# Altium PCB PCB2.PcbDoc (part 1 of 2)
Units mm, origin at the board's own origin, x right, y up, seen from the top; angles counter-clockwise.
Board outline 90.3 x 60.42 mm, 2 copper layers (Layer1, Layer4), stack 0.325 mm thick; 123 components, 111 nets, 492 pads, 352 vias.
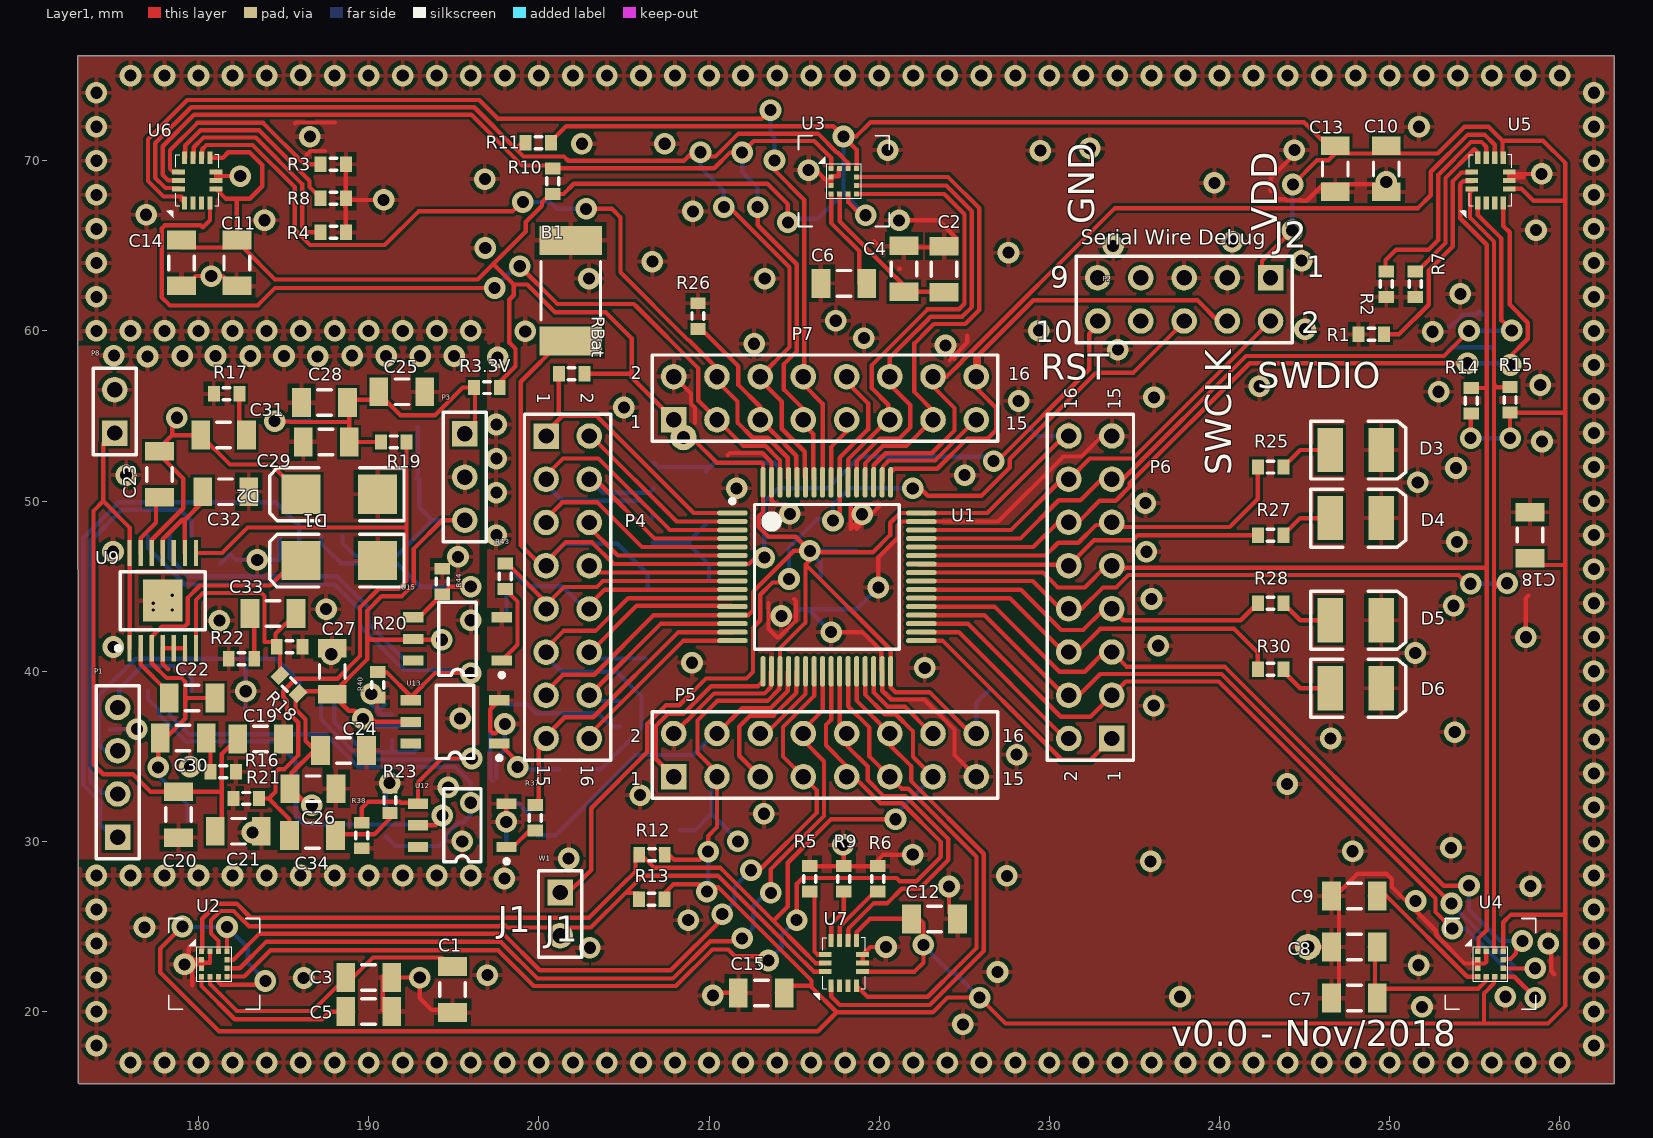
[diagram p0: Layer1 view]
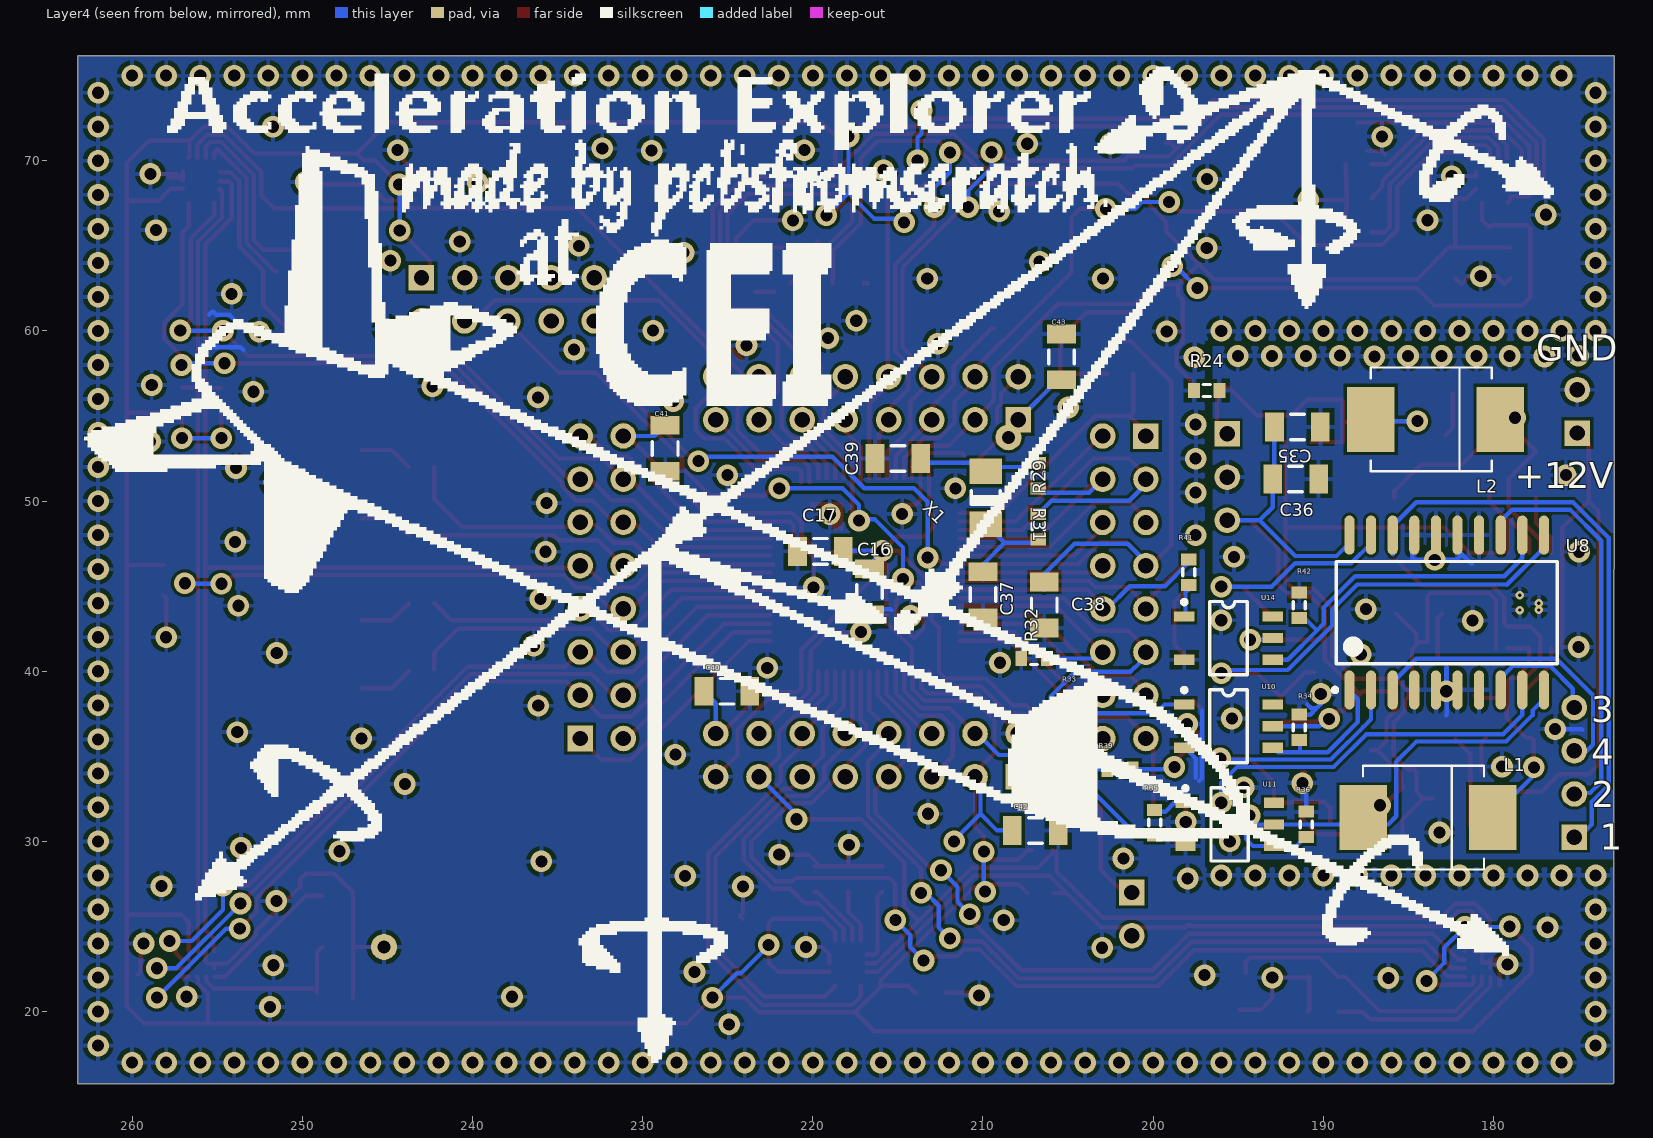
[diagram p1: Layer4 view, seen from below]

## Layer stack, top to bottom
Top Solder: solder mask 0.0102, Solder Resist, Dk 3.5
Layer1: signal copper 0.0356
Dielectric 1: core 0.254, FR-4, Dk 4.2
Layer4: signal copper 0.0356
Bottom Solder: solder mask 0.0102, Solder Resist, Dk 3.5

## Board outline
172.9,76.175 263.175,76.175 263.2,76.15 263.2,15.75 172.975,15.75 172.925,15.8

## Design rules (kind name [scope] priority, off if disabled: settings)
Clearance Clearance_2 [InNamedPolygon('Power4-AGND')] p1: gap=0.254 except(0.152: SMDPad-Poly)
Clearance Power4-AGND [InNamedPolygon('Power4-AGND')] p2: gap=0.254 except(0.381: SMDPad-Poly) // Power4-AGND 15 mil clereance
Clearance Clearance_1 [InNamedPolygon('Power4-AGND')] p3: gap=0.254 except(0.305: Arc-Poly)
Clearance [All] p4: gap=0.178
PolygonConnect [All] p1: connectstyle=Relief reliefconductorwidth=0.254 reliefentries=4 polygonreliefangle="90 Angle" airgapwidth=0.254
RoomDefinition Driver&Converter [InComponentClass('Driver&Converter')] p1: confinementstyle=ConfineIn formatcopy=TRUE lockcomponents=FALSE outline 172.925,15.8 263.15,15.8 263.15,76.15 172.925,76.15
RoutingVias [All] p1: holewidth=0.711 width=1.27 viastyle="Through Hole" minholewidth=0.711 minwidth=1.27 maxholewidth=0.711 maxwidth=1.27
SolderMaskExpansion [All] p1: expansion=0.102
UnRoutedNet [InNet('No Net')] p1:
Width [All] p1: maxlimit=0.254 minlimit=0.254 preferedwidth=0.254
29 further rules are at their usual default settings.

## Classes and differential pairs
component class PCB1: B1 C1 C2 C3 C4 C5 C6 C7 C8 C9 C10 C11 C12 C13 C14 C15 C16 C17 C18 C37 C38 C39 C40 C41 C42 C43 D3 D4 D5 D6 D? P2 P4 P5 P6 P7 R1 R2 R3 R3.3V R4 R5 R6 R7 R8 R9 R10 R11 R12 R13 R14 R15 R24 R25 R26 R27 R28 R29 R30 R31 R32 R33 R34 R35 R36 R37 R38 R39 R40 R41 R42 R43 R44 RBat SB1 U1 U2 U3 U4 U5 U6 U7 U10 U11 U12 U13 U14 U15 W1 X1
component class Driver&Converter: C19 C20 C21 C22 C23 C24 C25 C26 C27 C28 C29 C30 C31 C32 C33 C34 C35 C36 D1 D2 L1 L2 P1 P3 P8 R16 R17 R18 R19 R20 R21 R22 R23 U8 U9

## Components (designator, comment, footprint, x,y, rotation, side; value= is the part's Value field where it differs from the comment)
B1 "TD-0341 [RESET/Black]" KSS-2G 201.875,62.356 r90 top
C1 "Cap Semi" C1206 194.925,21.3 r90 top
C2 "Cap Semi" C1206 223.8,63.625 r270 top
C3 "Cap Semi" C1206 190,22 r180 top
C4 "Cap Semi" C1206 221.45,63.65 r270 top
C5 "Cap Semi" C1206 190,20 r180 top
C6 "Cap Semi" C1206 217.925,62.8 r0 top
C7 "Cap Semi" C1206 247.925,20.8 r0 top
C8 "Cap Semi" C1206 247.925,23.8 r0 top
C9 "Cap Semi" C1206 247.925,26.8 r0 top
C10 "Cap Semi" C1206 249.8,69.525 r90 top
C11 "Cap Semi" C1206 182.25,64 r90 top
C12 "Cap Semi" C1206 223.25,25.45 r180 top
C13 "Cap Semi" C1206 246.8,69.525 r90 top
C14 "Cap Semi" C1206 179,64 r90 top
C15 "Cap Semi" C1206 213.075,21.1 r0 top
C16 "Cap Semi" C1206 216.675,44.675 r90 bottom
C17 "Cap Semi" C1206 219.554,47.05 r180 bottom
C18 "Cap Semi" C1206 258.25,48 r270 top
C19 "74-TMCMA0J107MTRF" C1206 183.65,36.025 r0 top
C20 "Cap Semi" C1206 178.825,31.575 r90 top
C21 "Cap Semi" C1206 182.342,30.6 r180 top
C22 "Cap Semi" C1206 179.625,38.425 r180 top
C23 "Cap Semi" C1206 177.699,51.575 r270 top
C24 "74-TMCMA0J107MTRF" C1206 188.525,35.35 r0 top
C25 "74-TMCMA0J107MTRF" C1206 191.95,56.425 r0 top
C26 "Cap Semi" C1206 186.725,33.096 r180 top
C27 "Cap Semi" C1206 187.858,40 r270 top
C28 "Cap Semi" C1206 187.4,55.8 r0 top
C29 "Cap Semi" C1206 187.5,53.471 r0 top
C30 "Cap Semi" C1206 179.1,36.075 r180 top
C31 "Cap Semi" C1206 181.475,53.875 r180 top
C32 "Cap Semi" C1206 181.6,50.55 r180 top
C33 "Cap Semi" C1206 184.375,43.4 r0 top
C34 "Cap Semi" C1206 186.696,30.341 r180 top
C35 "Cap Semi" C1206 191.525,54.35 r0 bottom
C36 "Cap Semi" C1206 191.625,51.3 r0 bottom
C37 "Cap Semi" C1206 210,44.5 r270 bottom
C38 "Cap Semi" C1206 206.4,43.891 r90 bottom
C39 "Cap Semi" C1206 215,52.5 r0 bottom
C40 "Cap Semi" C1206 225.05,38.825 r0 bottom
C41 "Cap Semi" C1206 228.675,53.1 r90 bottom
C42 "Cap Semi" C1206 206.925,30.65 r0 bottom
C43 "Cap Semi" C1206 205.375,58.475 r270 bottom
D1 "MBRS320" SMB 188.275,46.5 r180 top
D2 "MBRS320" SMB 188.275,50.4 r180 top
D3 "LED3" 3.5X2.8X1.9 248,53 r0 top
D4 "LED3" 3.5X2.8X1.9 248,49 r0 top
D5 "LED3" 3.5X2.8X1.9 248,43 r0 top
D6 "LED3" 3.5X2.8X1.9 248,39 r0 top
L1 "Inductor Iron Dot" DIODE_SMC 183.85,31.4 r0 bottom
L2 "Inductor Iron Dot" DIODE_SMC 183.4,54.8 r0 bottom
P1 "Header 4" HDR1X4 175.25,30.25 r90 top
P2 "Header 5X2" HDR2X5 243,63.125 r180 top
P3 "Header 3" HDR1X3 195.65,53.95 r270 top
P4 "Header 8X2" HDR2X8 200.426,53.825 r270 top
P5 "Header 8X2" HDR2X8 207.925,33.8 r0 top
P6 "Header 8X2" HDR2X8 233.675,36.05 r90 top
P7 "Header 8X2" HDR2X8 207.925,54.776 r0 top
P8 "Header 2" HDR1X2 175.075,54 r90 top
R1 "Res3" J1-0603 248.925,59.8 r180 top
R2 "Res3" J1-0603 249.8,62.75 r270 top
R3 "Res3" J1-0603 187.925,69.8 r0 top
R3.3V "Res3" J1-0603 196.95,56.675 r0 top
R4 "Res3" J1-0603 187.925,65.8 r0 top
R5 "Res3" J1-0603 215.925,27.8 r90 top
R6 "Res3" J1-0603 219.925,27.8 r90 top
R7 "Res3" J1-0603 251.5,62.75 r90 top
R8 "Res3" J1-0603 187.925,67.8 r180 top
R9 "Res3" J1-0603 217.925,27.8 r270 top
R10 "Pull-up SDA1" J1-0603 200.825,68.8 r270 top
R11 "Pull-up SCL1" J1-0603 199.975,71.05 r0 top
R12 "Pull-up SDA2" J1-0603 206.65,29.225 r0 top
R13 "Pull-up SCL2" J1-0603 206.625,26.6 r0 top
R14 "Pull-up SDA3" J1-0603 254.8,55.9 r270 top
R15 "Pull-up SCL3" J1-0603 257.075,55.95 r270 top
R16 "Res3" J1-0603 181.45,34.1 r180 top
R17 "Res3" J1-0603 181.65,56.3 r0 top
R18 "Res3" J1-0603 185.317,39.225 r135 top
R19 "Res3" J1-0603 191.475,53.475 r0 top
R20 "Res3" J1-0603 185.35,41.45 r180 top
R21 "Res3" J1-0603 182.8,32.525 r0 top
R22 "Res3" J1-0603 182.525,40.729 r0 top
R23 "Res3" J1-0603 191.25,32.425 r270 top
R24 "Res3" J1-0603 196.85,56.5 r0 bottom
R25 "Res3" J1-0603 243,52 r180 top
R26 "Res3" J1-0603 209.35,60.875 r270 top
R27 "Res3" J1-0603 243,48 r180 top
R28 "Res3" J1-0603 243,44 r180 top
R29 "Res3" J1-0603 206.75,48.5 r90 bottom
R30 "Res3" J1-0603 243,40.125 r180 top
R31 "Res3" J1-0603 206.75,51.5 r90 bottom
R32 "Res3" J1-0603 207,40.75 r0 bottom
R33 "Res3" J1-0603 204.75,37.5 r90 bottom
R34 "Res3" J1-0603 191.419,36.7 r270 bottom
R35 "Res3" J1-0603 199.915,31.105 r270 bottom
R36 "Res3" J1-0603 191,31 r270 bottom
R37 "Res3" J1-0603 199.791,31.383 r90 top
R38 "Res3" J1-0603 189.6,30.35 r90 top
R39 "Res3" J1-0603 201.95,34.25 r0 bottom
R40 "Res3" J1-0603 190.525,39.2 r90 top
R41 "Res3" J1-0603 197.9,45.824 r90 bottom
R42 "Res3" J1-0603 191.419,43.875 r270 bottom
R43 "Res3" J1-0603 198.025,45.575 r90 top
R44 "Res3" J1-0603 194.325,45.275 r270 top
RBat "Res3" J1-0603 201.925,57.475 r0 top
U1 "STM32F401RBT6" STM-LQFP64_N 216.925,45.55 r0 top
U2 "LIS3MDL" "LGA12 2x2x1mm" 180.925,22.8 r0 top
U3 "LIS3MDL" "LGA12 2x2x1mm" 217.925,68.8 r0 top
U4 "LIS3MDL" "LGA12 2x2x1mm" 255.925,22.8 r0 top
U5 "LSM6DSL" LGA14L-2.5X3X0.86p0.5 255.925,68.8 r90 top
U6 "LSM6DSL" LGA14L-2.5X3X0.86p0.5 179.925,68.8 r90 top
U7 "LSM6DSL" LGA14L-2.5X3X0.86p0.5 217.925,22.8 r90 top
U8 "L293DD" SO20_N 182.75,43.45 r90 bottom
U9 "TPS54383" TPS54383_converter 177.9,44.15 r90 top
U10 "Optoisolator2" SOP5(6) 195.575,36.775 r270 bottom
U11 "Optoisolator2" SOP5(6) 195.5,31 r270 bottom
U12 "Optoisolator2" SOP5(6) 195.5,30.95 r90 top
U13 "Optoisolator2" SOP5(6) 195.075,37.025 r90 top
U14 "Optoisolator2" SOP5(6) 195.575,41.95 r270 bottom
U15 "Optoisolator2" SOP5(6) 195.225,41.9 r90 top
W1 "Jumper" HDR1X2 201.25,27 r270 top
X1 "815-abx0712032.768kt" CAPC3216M 209.829,50.2 r90 bottom

## Footprints (in the part's own frame and the unit in brackets; to place one, negate y for a bottom-side part, rotate by r counter-clockwise, add the part's x,y. Pads: shape width x height; smd on the part's side, far side on the other; paste and mask are expansions set on the pad)
3.5X2.8X1.9 [mm] "SM LED; 2 C-Bend Leads; Body 3.5 x 2.8 x 1.9 mm, inc leads (LxWxH typ)"
  rect 1.5x2.6 smd: 1(-1.5,0) 2(1.5,0)
  silkscreen extent -2.65,-1.7 2.95,1.7
C1206 [mm] "Chip Capacitor, Body 3.2x1.6mm, IPC High Density"
  rect 1.1x1.7 smd: 1(-1.35,0) 2(1.35,0)
  silkscreen extent -0.4,-0.75 0.4,0.75, body extent -1.7,-0.9 1.7,0.9, height 1.3
CAPC3216M [mm] "Chip Capacitor, Body 3.2x1.6mm, IPC Low Density"
  rect 1.5x1.9 smd: 1(-1.55,0) 2(1.55,0)
  silkscreen extent -0.4,-0.85 0.4,0.85, body extent -1.7,-0.9 1.7,0.9, height 1.35
DIODE_SMC [mil] "Diode; 2 Leads"
  rect 110x150 smd: 1(-150,0) 2(150,0)
  silkscreen extent -130,-120 150,120
HDR1X2 [mm] "Connector; Header; 2 Position"
  rect 1.5x1.5 hole 0.9: 1(0,0)
  round 1.5 hole 0.9: 2(2.54,0)
  silkscreen extent -1.27,-1.27 3.81,1.27
HDR1X3 [mm] "Connector; Header; 3 Position"
  rect 1.5x1.5 hole 0.9: 1(0,0)
  round 1.5 hole 0.9: 2(2.54,0) 3(5.08,0)
  silkscreen extent -1.27,-1.27 6.35,1.27
HDR1X4 [mm] "Connector; Header; 4 Position"
  rect 1.5x1.5 hole 0.9: 1(0,0)
  round 1.5 hole 0.9: 2(2.54,0) 3(5.08,0) 4(7.62,0)
  silkscreen extent -1.27,-1.27 8.89,1.27
HDR2X5 [mm] "Connector; Header; 5x2 Position"
  rect 1.5x1.5 hole 0.9: 1(0,0)
  round 1.5 hole 0.9: 2(0,2.54) 3(2.54,0) 4(2.54,2.54) 5(5.08,0) 6(5.08,2.54) 7(7.62,0) 8(7.62,2.54) 9(10.16,0) 10(10.16,2.54)
  silkscreen extent -1.27,-1.27 11.43,3.81
HDR2X8 [mm] "Connector; Header; 8x2 Position"
  rect 1.5x1.5 hole 0.9: 1(0,0)
  round 1.5 hole 0.9: 2(0,2.54) 3(2.54,0) 4(2.54,2.54) 5(5.08,0) 6(5.08,2.54) 7(7.62,0) 8(7.62,2.54) 9(10.16,0) 10(10.16,2.54) 11(12.7,0) 12(12.7,2.54) 13(15.24,0) 14(15.24,2.54) 15(17.78,0) 16(17.78,2.54)
  silkscreen extent -1.27,-1.27 19.05,3.81
J1-0603 [mm] "Chip Resistor, Body 1.6x0.8mm, IPC High Density"
  rect 0.7x0.9 smd: 1(-0.75,0) 2(0.75,0)
  silkscreen extent -0.2,-0.35 0.2,0.35, body extent -0.85,-0.48 0.85,0.48, height 0.9
KSS-2G [mm] "Switch, Side Tact, SM; 2 Leads; Body 7x3.5mm (LxW)"
  rect 1.7x3.7 smd: 1(2.95,0) 2(-2.95,0)
  silkscreen extent -1.7,-1.75 1.7,1.75, body extent -2.75,-2.65 2.75,1.75, height 1.75
"LGA12 2x2x1mm" [mm] "LGA12 2x2x1mm"
  rect 0.3x0.3 smd mask+0.05: 1(-0.75,0.75) 2(-0.75,0.25) 3(-0.75,-0.25) 4(-0.75,-0.75) 5(-0.25,-0.75) 6(0.25,-0.75) 7(0.75,-0.75) 8(0.75,-0.25) 9(0.75,0.25) 10(0.75,0.75) 11(0.25,0.75) 12(-0.25,0.75)
  silkscreen extent -2.67,-2.67 2.67,2.67, body extent -1.02,-1.02 1.02,1.02, height 1.1
LGA14L-2.5X3X0.86p0.5 [mm] "LGA14 2.5x3x0.86mm pitch0.5mm"
  rect 0.75x0.3 smd mask+0.05: 1(-1.279,0.75) 2(-1.279,0.25) 3(-1.279,-0.25) 4(-1.279,-0.75) 8(1.381,-0.75) 9(1.381,-0.25) 10(1.381,0.25) 11(1.381,0.75)
  rect 0.3x0.75 smd mask+0.05: 5(-0.449,-1.1) 6(0.051,-1.1) 7(0.551,-1.1) 12(0.551,1.1) 13(0.051,1.1) 14(-0.449,1.1)
  silkscreen extent -2.11,-1.25 1.57,1.8, body extent -1.47,-1.27 1.57,1.27, height 0.9
SMB [mm] "DO-214-AA/SMB; 2 C-Bend Leads; Body 5.3 x 3.6 mm, inc. leads (LxW)"
  rect 2.3x2.3 smd: 1(-2.25,0) 2(2.25,0)
  silkscreen extent -3.8,-1.55 4.1,1.55
SO20_N [mm] "SOIC, 20-Leads, Body 12.8x7.5mm, Pitch 1.27mm, IPC Medium Density"
  oval 2.3x0.6 smd: 1(-4.55,5.715) 2(-4.55,4.445) 3(-4.55,3.175) 4(-4.55,1.905) 5(-4.55,0.635) 6(-4.55,-0.635) 7(-4.55,-1.905) 8(-4.55,-3.175) 9(-4.55,-4.445) 10(-4.55,-5.715) 11(4.55,-5.715) 12(4.55,-4.445) 13(4.55,-3.175) 14(4.55,-1.905) 15(4.55,-0.635) 16(4.55,0.635) 17(4.55,1.905) 18(4.55,3.175) 19(4.55,4.445) 20(4.55,5.715)
  silkscreen extent -4.67,-6.5 3,6.69, body extent -3.75,-6.4 3.75,6.4, height 2.65
SOP5(6) [mm] "Small Outline; 6 Leads (1 Absent); Body Width 4.4 mm; Pitch 1.27 mm"
  rect 0.6x1.2 smd: 1(-1.27,-2.6) 3(1.27,-2.6) 4(1.27,2.6) 5(0,2.6) 6(-1.27,2.6)
  silkscreen extent -2.24,-2.72 2.15,1.1
STM-LQFP64_N [mm] "Thin QFP, 64-Leads, Body 10x10mm, Pitch 0.5mm, IPC Medium Density"
  oval 1.8x0.3 smd: 1(-5.55,3.75) 2(-5.55,3.25) 3(-5.55,2.75) 4(-5.55,2.25) 5(-5.55,1.75) 6(-5.55,1.25) 7(-5.55,0.75) 8(-5.55,0.25) 9(-5.55,-0.25) 10(-5.55,-0.75) 11(-5.55,-1.25) 12(-5.55,-1.75) 13(-5.55,-2.25) 14(-5.55,-2.75) 15(-5.55,-3.25) 16(-5.55,-3.75) 33(5.55,-3.75) 34(5.55,-3.25) 35(5.55,-2.75) 36(5.55,-2.25) 37(5.55,-1.75) 38(5.55,-1.25) 39(5.55,-0.75) 40(5.55,-0.25) 41(5.55,0.25) 42(5.55,0.75) 43(5.55,1.25) 44(5.55,1.75) 45(5.55,2.25) 46(5.55,2.75) 47(5.55,3.25) 48(5.55,3.75)
  oval 0.3x1.8 smd: 17(-3.75,-5.55) 18(-3.25,-5.55) 19(-2.75,-5.55) 20(-2.25,-5.55) 21(-1.75,-5.55) 22(-1.25,-5.55) 23(-0.75,-5.55) 24(-0.25,-5.55) 25(0.25,-5.55) 26(0.75,-5.55) 27(1.25,-5.55) 28(1.75,-5.55) 29(2.25,-5.55) 30(2.75,-5.55) 31(3.25,-5.55) 32(3.75,-5.55) 49(3.75,5.55) 50(3.25,5.55) 51(2.75,5.55) 52(2.25,5.55) 53(1.75,5.55) 54(1.25,5.55) 55(0.75,5.55) 56(0.25,5.55) 57(-0.25,5.55) 58(-0.75,5.55) 59(-1.25,5.55) 60(-1.75,5.55) 61(-2.25,5.55) 62(-2.75,5.55) 63(-3.25,5.55) 64(-3.75,5.55)
  silkscreen extent -5.67,-4.25 4.25,4.57, body extent -5,-5 5,5, height 1.6
TPS54383_converter [mm] "TSOP, 14-Leads, Body 5,00x4,40mm, Pitch 0,65mm, Thermal Pad 2,31x2,46mm, IPC Medium Density"
  rect 1.55x0.25 smd: 1(-2.8,1.95) 2(-2.8,1.3) 3(-2.8,0.65) 4(-2.8,0) 5(-2.8,-0.65) 6(-2.8,-1.3) 7(-2.8,-1.95) 8(2.8,-1.95) 9(2.8,-1.3) 10(2.8,-0.65) 11(2.8,0) 12(2.8,0.65) 13(2.8,1.3) 14(2.8,1.95)
  rect 2.46x2.31 smd: 15(0,0)
  silkscreen extent -2.92,-2.5 1.7,2.75, body extent -2.25,-2.55 2.25,2.55, height 1.2

## Part data
B1: library part KSS241GLFS, "Switch, Subminiature Side-Actuated Tact, SMT, KSS Series, Std Actuator, 2 Gull Wing Leads, SPST, 4N Force, Silver Contact"
C1 C2 C3 C4 C5 C6 C7 C8 C9 C10 C11 C12 C13 C14 C15 C16 C17 C18 C20 C21 C22 C23 C26 C27 C28 C29 C30 C31 C32 C33 C34 C35 C36 C37 C38 C39 C40 C41 C42 C43: "Capacitor (Semiconductor SIM Model)"
C19 C24 C25: library part "Cap Pol3", "Polarized Capacitor (Surface Mount)"
D1 D2: library part "D Schottky", "Schottky Diode"
D3 D4 D5 D6: "Typical BLUE SiC LED"
L1 L2: "Magnetic-Core Inductor with Winding Polarity Marking"
P1: "Header, 4-Pin"
P2: "Header, 5-Pin, Dual row"
P3: "Header, 3-Pin"
P4 P5 P6 P7: "Header, 8-Pin, Dual row"
P8: "Header, 2-Pin"
R1 R2 R3 R3.3V R4 R5 R6 R7 R8 R9 R16 R17 R18 R19 R20 R21 R22 R23 R24 R25 R26 R27 R28 R29 R30 R31 R32 R33 R34 R35 R36 R37 R38 R39 R40 R41 R42 R43 R44 RBat: "Resistor"
R10 R11 R12 R13 R14 R15: library part Res3, "Resistor"
U1: "ARM Cortex-M4 32-bit MCU+FPU, 105 DMIPS, 128 kB Flash, 64 kB Internal RAM, 48 I/Os, 64-pin LQFP, -40 to 85 degC, Tray"
U2 U3 U4: "Magnetic sensor MEMS (3 Axis)"
U5 U6 U7: "Accelero + Gyro MEMS (6 Axis)"
U8: "Push-Pull Four Channel Driver With Diode"
U10 U11 U12 U13 U14 U15: "5 Pin Mini Flat Pack Optocoupler"
W1: "Jumper Wire"
X1: library part XTAL, "Crystal Oscillator"

## Free pads (board coordinates)
  round 1.524 hole 0.762: 2(245.2,23.8) 3(208.5,53.75)

## Via types
v1: diameter 1.27, hole 0.711, Layer1 to Layer4, 348 vias
v2: diameter 0.5, hole 0.2, Layer1 to Layer4, 4 vias

## Nets (pads, with @x,y where several pads share a name; then routed paths per layer and width w, separated by ;. In a path a pad name is that pad's centre, name@x,y a point inside that pad or via, vN(x,y) a via of type N, cw(c..) or ccw(c..) an arc to the next point about the centre after c; other vN are vias at no path point)
AGND: C19.2 C20.1 C21.1 C24.2 C25.2 C26.1 C27.1 C28.1 C29.1 C32.1 C35.1 C36.1 D1.1 D2.1 P3.2 P8.2 R16.1 R17.1 R20.1 R21.1 R22.1 R23.1 R24.1 R34.1 R36.1 R38.1 R40.1 R42.1 R44.1 U8.4 U8.5 U8.6 U8.7 U8.14 U8.15 U8.16 U8.17 U9.4 U9.5 U9.6 U9.15 | length 19.1
  Layer1 w0.254: 178.225,40.111 177.9,40.436 U9.4@177.9,41.35 U9.5@178.55,41.35 U9.6@179.2,41.35 ; 191.073,34.073 191.227,34.073 191.234,34.066 v1(191.234,33.427)
  Layer4 w0.254: 174.775,36.55 174.825,36.6 v1(176.375,36.6) ; 181.275,46.3 181.85,46.875 182.175,46.55 v1(183.45,46.55) 184.772,46.55 184.772,47.833 U8.17@184.655,47.95 ; 182.775,37.425 182.75,37.45 182.75,40.225 182.775,40.2 v1(182.775,38.825) ; v1(190.15,38.673) 190.15,38.071 190.398,37.823 ; 190.939,38.054 190.708,37.823 190.398,37.823 ; R36.1@191,31.75 191,32.825 191.234,33.059 v1(191.234,33.427) ; R34.1@191.375,37.45 190.771,37.45 190.398,37.823
  other v1: 195.5,30 183.175,30.525 194.675,33.175 179.5,34.4 195.375,37.225 187.8,41 175,41.425 181.225,42.975 196,43 187.5,43.65 195.25,46.725 174.975,47.025 175.75,51.525 177,58.5 187,58.5 179.05,58.525 181,58.525 183.05,58.525 185.025,58.525 191.025,58.525 193.025,58.525 195.025,58.525 175.025,58.55 189.025,58.55
  other v2: 177.328,43.602 178.45,43.6 177.328,44.002 178.459,44.477
BOOT0: P7.5 R26.2 U1.60 | length 12.5
  Layer1 w0.254: R26.2@209.35,60.125 209.525,60.125 211.725,57.925 211.725,56.825 213.005,55.545 P7.5@213.005,54.8 ; 213.807,53.982 213.816,53.982 215.13,52.668 U1.60@215.13,51.35 ; 213.807,53.982 213.008,54.781 213.807,53.982 ; U1.60@215.13,51.35 215.175,51.35 U1.60@215.13,51.35
"DRDY MAGNETIC1": P7.12 U1.53 U3.8 | length 28.6
  Layer1 w0.254: U1.53@218.675,51.35 218.675,52.325 220.027,53.677 221.177,53.677 221.825,54.325 221.825,55.65 220.625,56.85 P7.12@220.625,57.316 220.625,58.436 221.584,59.394 222.821,60.632 223.033,60.843 224.877,60.843 225.447,61.414 225.447,67.039 223.936,68.55 U3.8@218.675,68.55
"DRDY MAGNETIC2": P5.8 U1.24 U2.8 | length 51.6
  Layer1 w0.254: U2.8@181.675,22.55 182.425,22.55 183.973,24.098 197.767,24.098 199.924,21.941 207.876,21.941 210.07,24.134 211.784,24.134 v1(211.95,24.3) ; v1(213.635,26.976) 213.635,28.375 214.103,28.842 216.757,31.496 216.757,34.718 215.545,35.93 P5.8@215.545,36.34 215.545,36.57 216.675,37.7 U1.24@216.675,40
  Layer4 w0.254: v1(211.95,24.3) 212.6,24.95 212.6,26.225 213.351,26.976 v1(213.635,26.976)
"DRDY MAGNETIC3": P6.4 U1.36 U4.8 | length 47.6
  Layer1 w0.254: U1.36@222.475,43.3 226.175,43.3 230.885,38.59 P6.4@231.135,38.59 231.744,38.59 232.997,39.843 240.122,39.843 253.615,26.35 v1(253.636,26.35) ; U4.8@256.675,22.55 256.695,22.53 258.53,22.53 v1(258.55,22.55)
  Layer4 w0.254: v1(253.636,26.35) 253.636,26.329 257.414,22.55 v1(258.55,22.55)
EN1: R34.2 U8.1 U10.4 | length 8.6
  Layer4 w0.254: U8.1@188.465,38.85 187.975,38.36 187.975,37.015 189.743,35.247 191.375,35.247 ; R34.2@191.375,35.95 191.375,35.247 ; U10.4@192.986,35.505 192.925,35.505 192.667,35.247 191.375,35.247
EN2: R40.2 U8.11 U13.4 | length 29.9
  Layer1 w0.254: R40.2@190.525,39.95 191.05,39.95 192.5,38.5 193.895,39.895 v1(196,39.895)
  Layer4 w0.254: U8.11@177.035,47.95 177.035,47.265 179.22,45.08 179.239,45.1 188.004,45.1 189.489,43.614 189.489,42.675 192.089,40.075 195.82,40.075 v1(196,39.895)
IN1: R38.2 U8.2 U12.4 | length 20.9
  Layer1 w0.254: R38.2@189.6,31.1 189.6,31.975 189.955,32.33 191.826,32.33 191.886,32.27 192.9,32.27 192.9,33.475 194.3,34.875 196.06,34.875 v1(196.06,34.877)
  Layer4 w0.254: U8.2@187.195,38.85 187.195,37.184 187.647,36.732 189.311,35.068 189.564,34.815 195.909,34.815 195.954,34.859 195.998,34.815 v1(196.06,34.877)
IN2: R36.2 U8.9 U11.4 | length 28.8
  Layer4 w0.254: U8.9@178.305,38.85 178.305,37.431 179.436,36.3 187.468,36.3 189.393,34.375 195.075,34.375 196,33.45 v1(196,32.275) 196,31.575 195.525,31.1 195.271,31.1 194.546,30.375 194.546,30.146 194.13,29.73 U11.4@192.9,29.73 191.575,29.73 191,30.305 R36.2@191,30.25
IN3: R42.2 U8.12 U14.4 | length 20
  Layer4 w0.254: U8.12@178.305,47.95 178.305,46.645 179.366,45.584 188.13,45.584 189.974,43.741 189.974,42.801 190.375,42.4 ; R42.2@191.175,43.125 191.1,43.125 190.375,42.4 ; U14.4@192.9,40.68 192.095,40.68 190.375,42.4
IN4: R44.2 U8.19 U15.4 | length 14.4
  Layer1 w0.254: U15.4@192.625,43.17 192.97,43.17 R44.2@194.325,44.525 194.775,44.975 v1(196,44.975)
  Layer4 w0.254: U8.19@187.195,47.95 187.195,47.515 188.366,46.343 191.657,46.343 193.025,44.975 195.7,44.975 v1(196,44.975)
"INT1 ACC1": P7.3 U1.62 U6.4 | length 52.6
  Layer1 w0.254: U6.4@180.675,67.521 180.675,66.5 180.25,66.075 180.12,66.205 178.024,66.205 177.845,66.026 177.845,61.974 178.319,61.5 183.475,61.5 184.5,62.525 v1(197.4,62.525) ; v1(198.875,63.8) 201.091,61.584 205.591,61.584 205.725,61.45 209.375,57.8 209.375,55.892 212.005,53.262 213.306,53.262 214.175,52.392 U1.62@214.175,51.35
  Layer4 w0.254: v1(197.4,62.525) 198.675,63.8 v1(198.875,63.8)
"INT1 ACC2": P5.11 U1.27 U7.4 | length 28.1
  Layer1 w0.254: U1.27@218.175,40 218.175,37.939 219.425,36.689 219.425,35 P5.11@220.625,33.8 221.32,33.105 221.708,33.105 225.718,29.094 225.718,23.743 224.75,22.775 222.85,20.875 219.321,20.875 U7.4@218.675,21.521
"INT1 ACC3": P6.12 U1.44 U5.4 | length 49.7
  Layer1 w0.254: U1.44@222.475,47.3 229.05,47.3 230.5,48.75 P6.12@231.135,48.75 231.675,48.75 232.95,50.025 233.902,50.025 234.73,50.853 234.73,51.059 241.771,58.1 v1(254.575,58.1) v1@254.8,58.1 ; U5.4@256.675,67.521 256.675,66.175 257.05,65.8 257.05,61.55 258.09,60.51 258.115,60.485 258.115,59.54 v1@256.95,58.375
  Layer4 w0.254: v1(254.575,58.1) 257,58.1 v1(257.1,58)
"INT2 ACC1": P7.4 U1.61 U6.9 | length 50.5
  Layer1 w0.254: U6.9@180.175,70.181 180.22,70.226 180.22,70.682 180.47,70.932 183.179,70.932 185.657,68.454 185.657,65.943 186.555,65.045 190.945,65.045 192.925,67.025 198.455,67.025 199.027,67.598 199.047,67.578 v1(199.06,67.578) ; v1(202.775,67.175) 204.3,67.175 204.8,66.675 204.8,63.444 208.774,59.47 208.805,59.47 210.465,57.81 210.465,57.06 211.675,55.85 211.675,54.614 212.569,53.72 213.457,53.72 214.63,52.548 214.63,51.35 U1.61@214.675,51.35
  Layer4 w0.254: v1(199.06,67.578) 200.647,67.578 201.05,67.175 v1(202.775,67.175)
"INT2 ACC2": P5.10 U1.26 U7.9 | length 22.7
  Layer1 w0.254: U1.26@217.675,40 217.675,36.75 P5.10@218.085,36.34 218.085,35.64 219.325,34.4 219.325,33.608 220.26,32.673 221.529,32.673 224.057,30.145 224.057,28.917 222.365,27.225 221.331,27.225 220.481,26.375 219.69,26.375 218.22,24.905 218.22,24.831 218.191,24.801 218.191,24.549 218.22,24.519 218.22,24.226 U7.9@218.175,24.181
"INT2 ACC3": P7.14 U1.51 U5.9 | length 50.7
  Layer1 w0.254: U1.51@219.675,51.35 219.675,52.104 220.385,52.814 223.089,52.814 224.425,54.15 224.425,55.469 223.165,56.729 P7.14@223.165,57.316 223.974,57.316 224.853,58.195 ; 224.853,58.213 233.857,67.218 251.661,67.218 252.418,67.975 252.418,69.35 254.604,71.536 255.575,71.536 256.175,70.936 U5.9@256.175,70.181
"INT MAGNETIC1": P7.11 U1.54 U3.7 | length 27.1
  Layer1 w0.254: U1.54@218.175,51.35 218.175,52.439 220.536,54.8 220.536,55.664 219.57,56.63 219.57,57.992 222.839,61.261 222.825,61.275 224.698,61.275 225.015,61.593 225.015,66.86 224.963,66.912 223.825,68.05 U3.7@218.675,68.05
"INT MAGNETIC2": P5.9 U1.25 U2.7 | length 64.3
  Layer1 w0.254: U2.7@181.675,22.05 181.691,22.066 182.691,22.066 184.232,23.607 197.608,23.607 199.706,21.509 208.055,21.509 208.096,21.55 210.196,23.65 211.125,23.65 211.525,23.25 213.237,23.25 v1(213.485,23.001) 213.485,23.26 213.525,23.3 v1@213.525,23.126 ; v1(215.15,25.375) 215.15,27.506 215.494,27.85 221.025,27.85 221.215,27.66 222.189,27.66 223.625,29.096 223.625,29.966 221.35,32.241 220.081,32.241 218.893,33.429 218.893,33.432 218.525,33.8 P5.9@218.085,33.8 218.085,34.44 216.875,35.65 216.875,36.85 217.175,37.15 U1.25@217.175,40
  Layer4 w0.254: v1(213.485,23.001) 214.275,23.791 214.275,24.5 v1(215.15,25.375)
"INT MAGNETIC3": P6.3 U1.35 U4.7 | length 49.7
  Layer1 w0.254: U1.35@222.475,42.8 225.2,42.8 230.675,37.325 232.41,37.325 P6.3@233.675,38.59 234.485,39.4 239.954,39.4 252.696,26.658 252.696,25.854 v1(253.675,24.875) ; U4.7@256.675,22.05 257.325,22.05 v1(258.55,20.825)
  Layer4 w0.254: v1(253.675,24.875) 254.479,24.875 258.529,20.825 v1(258.55,20.825)
NetC1_2: C1.2 C3.2 U2.5 | length 17
  Layer1 w0.254: U2.5@180.675,22.05 180.675,21.614 182.254,20.035 186.696,20.035 188.692,22.031 189.1,22.031 190.074,23.005 190.08,23.005 190.25,23.175 194.3,23.175 194.55,22.925 C1.2@194.55,22.275
NetC2_2: C2.2 C4.2 U3.5 | length 7.9
  Layer1 w0.254: U3.5@217.675,68.05 217.675,66.45 220.555,63.57 C4.2@221.327,62.798 ; C4.2@222.275,62.3 C2.2@223.375,62.3
NetC5_2: C5.2 U2.4 | length 10.5
  Layer1 w0.254: U2.4@180.175,22.05 180.175,21.504 182.128,19.551 187.262,19.551 187.711,20 C5.2@189.1,20
NetC6_2: C6.2 U3.4 | length 5.9
  Layer1 w0.254: U3.4@217.175,68.05 217.175,66.339 218.825,64.689 C6.2@218.825,62.8
NetC7_2: C7.2 C8.2 U4.5 | length 9.9
  Layer1 w0.254: C8.2@248.825,23.8 249.136,23.489 249.136,21.111 249.375,21.35 255.206,21.35 255.63,21.774 255.63,22.05 U4.5@255.675,22.05
NetC9_2: C9.2 U4.4 | length 8.3
  Layer1 w0.254: C9.2@248.825,26.8 249.81,26.8 254.56,22.05 U4.4@255.175,22.05
NetC22_1: C22.1 C30.2 D1.2 L1.1 U9.3 | length 27.2
  Layer1 w0.254: v1(177.625,34.35) 177.625,35.95 C30.2@177.75,36.075 178.075,36.075 179.225,37.225 179.225,38.3 ; C22.1@180.972,38.428 C22.1@181.1,38.556 ; C22.1@180.975,38.425 179.35,38.425 179.225,38.3 ; D1.2@186.025,46.5 185.675,46.5 184.214,45.039 180.086,45.039 180.073,45.025 179.36,44.312 179.36,42.794 179.181,42.615 177.834,42.615 177.649,42.43 177.25,42.031 U9.3@177.25,41.35 177.25,40.475 178.125,39.6 179,39.6 179.225,39.375 179.225,38.3
  Layer4 w0.254: v1(177.625,34.35) 177.625,33.894 179.35,32.169 L1.1@179.35,31.2
NetC22_2: C22.2 U9.2 | length 3.7
  Layer1 w0.254: U9.2@176.6,41.35 176.6,40.4 C22.2@178.125,38.875 ; C22.2@178.125,38.875 178.4,38.875 C22.2@178.125,38.875
NetC23_1: C23.1 C31.2 D2.2 L2.1 U9.12 | length 19
  Layer1 w0.254: U9.12@177.25,46.95 177.25,47.725 179.1,49.575 179.1,51.325 177.6,52.825 177.5,52.925 177.6,53.025 178.45,53.875 ; v1(178.725,54.9) 178.45,54.625 178.45,53.875 ; D2.2@185.825,50.2 185.825,50.6 184.275,52.15 181.85,52.15 C31.2@180.125,53.875 178.45,53.875
NetC23_2: C23.2 U9.13 | length 3.6
  Layer1 w0.254: U9.13@176.6,46.95 176.6,47.825 177.5,48.725 C23.2@177.5,50.225
NetC30_1: C30.1 R16.2 | length 2.1
  Layer1 w0.254: C30.1@180.45,36.075 180.7,35.825 R16.2@180.7,34.1
NetC31_1: C31.1 R17.2 | length 2.6
  Layer1 w0.254: R17.2@182.4,56.3 182.4,54.3 C31.1@182.825,53.875
NetC32_2: C32.2 U9.9 U9.11 | length 6.6
  Layer1 w0.254: U9.11@177.9,46.95 177.9,47.764 179.044,48.908 179.2,48.908 ; U9.9@179.2,46.95 179.2,48.908 ; C32.2@180.25,50.55 180.25,49.958 179.2,48.908
NetC33_1: C33.1 R22.2 | length 2.8
  Layer1 w0.254: C33.1@183.025,43.4 183.275,43.15 R22.2@183.275,40.729
NetC33_2: C33.2 R18.2 R20.2 U9.7 | length 15.1
  Layer1 w0.254: U9.7@179.85,41.35 179.85,44.192 180.258,44.6 183.7,44.6 183.88,44.42 183.88,41.725 184.35,41.725 R20.2@184.529,41.546 ; R18.2@184.786,39.755 R20.2@184.786,41.289 ; C33.2@185.725,43.4 184.529,42.204 R20.2@184.529,41.546 ; R20.2@184.529,41.546 R20.2@184.786,41.289 ; R20.2@184.529,41.546 R20.2@184.786,41.289
NetC34_1: C34.1 R23.2 | length 4
  Layer1 w0.254: C34.1@188.046,30.341 188.129,30.425 190.334,30.425 191.25,31.342 R23.2@191.25,31.675
NetC34_2: C34.2 R19.2 R21.2 U9.8 | length 43.7
  Layer1 w0.254: U9.8@179.85,46.95 181.387,46.95 182.882,48.445 192.225,48.445 ; R21.2@183.55,32.525 184.128,32.525 ; C34.2@185.346,30.341 185.346,31.307 184.712,31.941 184.699,31.941 184.52,32.119 184.52,32.133 184.128,32.525 ; R19.2@192.225,53.475 192.225,46.131 192.225,45.298 191.776,44.849 190.589,44.849 189.493,43.754 189.493,40.896 188.163,39.565 185.715,39.565 184.977,38.826 185.015,38.788 184.977,38.75 184.977,38.498 185.2,38.274 185.2,37.656 185.855,37.001 185.855,35.049 185.057,34.251 184.699,34.251 184.52,34.072 184.52,32.917 184.128,32.525
NetC37_1: C37.1 R29.1 X1.1 | length 6.3
  Layer4 w0.254: R29.1@206.675,47.55 208.729,47.55 ; X1.1@209.829,48.65 208.729,47.55 ; C37.1@210,45.4 210,46.279 208.729,47.55
NetC39_1: C39.1 R31.2 X1.2 | length 8
  Layer4 w0.254: R31.2@206.75,52.25 207,52 X1.2@210.079,52 ; X1.2@209.829,51.75 210.329,52.25 213.85,52.25 C39.1@214.1,52
NetD3_1: D3.1 R25.1 | length 3.2
  Layer1 w0.254: R25.1@243.75,52 244.75,53 D3.1@246.5,53
NetD4_1: D4.1 R27.1 | length 3.2
  Layer1 w0.254: R27.1@243.75,48 244.75,49 D4.1@246.5,49
NetD5_1: D5.1 R28.1 | length 3.2
  Layer1 w0.254: R28.1@243.75,44 244.75,43 D5.1@246.5,43
NetD6_1: D6.1 R30.1 | length 3.2
  Layer1 w0.254: R30.1@243.75,40 244.75,39 D6.1@246.5,39
NetR1_1: R1.1 U5.12 | length 12.5
  Layer1 w0.254: R1.1@249.675,59.8 250.55,59.8 252.291,61.541 252.291,63.552 253.713,64.975 253.713,68.806 254.213,69.306 254.78,69.306 U5.12@254.825,69.351
NetR2_1: R2.1 U5.10 | length 12.5
  Layer1 w0.254: R2.1@249.75,63.5 249.75,64.15 250.375,64.775 252.279,64.775 252.85,65.346 252.85,69.171 254.783,71.104 255.396,71.104 255.675,70.825 U5.10@255.675,70.181
NetR3_1: R3.1 U6.12 | length 12.5
  Layer1 w0.254: U6.12@179.084,69.313 178.787,69.313 U6.12@178.825,69.351 178.499,69.351 178.325,69.525 178.325,70.619 179.933,72.227 183.798,72.227 186.225,69.8 R3.1@187.175,69.8
NetR4_1: R4.1 U6.10 | length 12.1
  Layer1 w0.254: U6.10@179.675,70.181 179.72,70.181 179.72,70.793 180.291,71.364 183.358,71.364 186.088,68.633 186.088,66.122 186.411,65.8 R4.1@187.175,65.8
NetR5_1: R5.1 U7.12 | length 4.3
  Layer1 w0.254: R5.1@215.925,27.05 216.195,26.78 216.195,23.53 216.374,23.351 U7.12@216.825,23.351
NetR6_1: R6.1 U7.10 | length 3.9
  Layer1 w0.254: U7.10@217.675,24.181 217.675,24.971 219.754,27.05 R6.1@219.925,27.05
NetR7_2: R7.2 U5.11 | length 9.3
  Layer1 w0.254: R7.2@251.5,63.5 251.615,63.5 253.282,65.167 253.282,68.992 254.823,70.533 254.962,70.672 254.978,70.672 255.175,70.475 U5.11@255.175,70.181
NetR8_2: R8.2 U6.11 | length 11.1
  Layer1 w0.254: U6.11@179.175,70.181 179.22,70.181 179.22,70.903 180.112,71.795 183.555,71.795 186.52,68.83 186.52,68.455 R8.2@187.175,67.8 R8.2@187.089,67.8
NetR9_2: R9.2 U7.11 | length 3.2
  Layer1 w0.254: U7.11@217.175,24.181 217.175,25.125 217.925,25.875 R9.2@217.925,27.05
NetR33_1: R33.1 U10.1 | length 7.2
  Layer4 w0.254: U10.1@198.1,38.07 198.125,38.045 199.33,38.045 199.85,37.525 203.5,37.525 204.275,36.75 R33.1@204.75,36.75
NetR35_1: R35.1 U11.1 | length 1.6
  Layer4 w0.254: U11.1@198.1,32.27 198.755,32.27 199.275,31.75 R35.1@199.5,31.75
NetR37_1: R37.1 U12.1 | length 2.8
  Layer1 w0.254: U12.1@198.1,29.68 U12.1@198.1,29.73 ; R37.1@200.004,30.633 R37.1@199.791,30.633 199.442,30.633 U12.1@198.54,29.73 ; U12.1@198.1,29.73 U12.1@198.54,29.73 ; U12.1@198.1,29.73 U12.1@198.54,29.73
NetR39_1: R39.1 U13.1 | length 4.9
  Layer1 w0.254: U13.1@197.675,35.755 198.75,34.68 v1(198.75,34.375)
  Layer4 w0.254: v1@198.7,33.825 198.75,33.875 v1(198.75,34.375) 198.875,34.25 R39.1@201.2,34.25
NetR41_1: R41.1 U14.1 | length 1.7
  Layer4 w0.254: R41.1@197.9,44.825 198.1,44.625 U14.1@198.1,43.22
NetR43_1: R43.1 U15.1 | length 4.9
  Layer1 w0.254: U15.1@197.825,40.63 198.75,41.555 198.75,44.1 R43.1@198.025,44.825
NRST: B1.2 C38.2 P2.10 P4.7 U1.7 | length 67.9
  Layer1 w0.254: B1.2@201.875,59.406 201.331,59.406 198.94,57.015 198.94,47.415 200.175,46.18 200.188,46.192 200.313,46.318 201.57,47.575 203.125,47.575 204.4,46.3 U1.7@211.375,46.3 212.35,46.3 212.725,46.675 213.4,46.675 213.45,46.725 v1@213.45,47 ; v1@226.833,52.242 232.34,57.748 232.34,59.835 232.655,60.15 232.655,60.4 P2.10@233.025,60.4
  Layer4 w0.254: P4.7@200.175,46.6 200.175,46.18 201.495,47.5 204.625,47.5 206.4,45.725 C38.2@206.4,44.791 ; v1(213.25,46.675) 213.25,49.939 214.061,50.75 216.975,50.75 218.825,52.6 226.475,52.6 v1(226.725,52.35)
OUT1: P1.3 U8.3 | length 18
  Layer4 w0.254: P1.3@175.35,35.23 174.606,35.23 174.15,35.685 174.15,38.587 174.306,38.743 176.3,40.737 184.538,40.737 185.925,39.35 U8.3@185.925,38.85
OUT2: P1.4 U8.8 | length 8.2
  Layer4 w0.254: U8.8@179.575,38.85 179.575,39.6 178.87,40.305 176.666,40.305 175.336,38.975 175.35,38.961 ; 175.35,38.961 175.35,37.77 175.35,38.961
OUT3: P1.2 U8.13 | length 23.9
  Layer4 w0.254: P1.2@175.25,32.79 175.194,32.846 174.322,32.846 173.666,33.502 173.666,47.666 175.5,49.5 178.9,49.5 179.575,48.825 U8.13@179.575,47.95
OUT4: P1.1 U8.18 | length 34.1
  Layer4 w0.254: P1.1@174.95,30.275 174.225,31 174.225,32.323 173.234,33.315 173.234,47.844 175.321,49.932 184.543,49.932 185.925,48.55 185.925,47.95 U8.18@185.925,46.875
PA0: P4.14 R33.2 U1.14 | length 19.1
  Layer1 w0.254: P4.14@202.715,38.585 202.715,38.56 P4.14@202.935,38.56 ; U1.14@211.375,42.8 207.175,42.8 ; P4.14@202.935,38.56 P4.14@202.963,38.588 ; P4.14@202.935,38.56 P4.14@202.963,38.588 ; P4.14@202.963,38.588 207.175,42.8 ; P4.14@202.963,38.588 207.175,42.8
  Layer4 w0.254: R33.2@204.75,38.25 P4.14@203.05,38.25 ; P4.14@203.05,38.25 202.715,38.585 P4.14@203.05,38.25